# Altium PCB RoboticArmIEEE_Main.PcbDoc
Units mil, origin at the board's own origin, x right, y up, seen from the top; angles counter-clockwise.
Board outline 2747.37 x 5357.31 mil, 2 copper layers (Top Layer, Bottom Layer); 36 components, 27 nets, 126 pads, 5 vias.
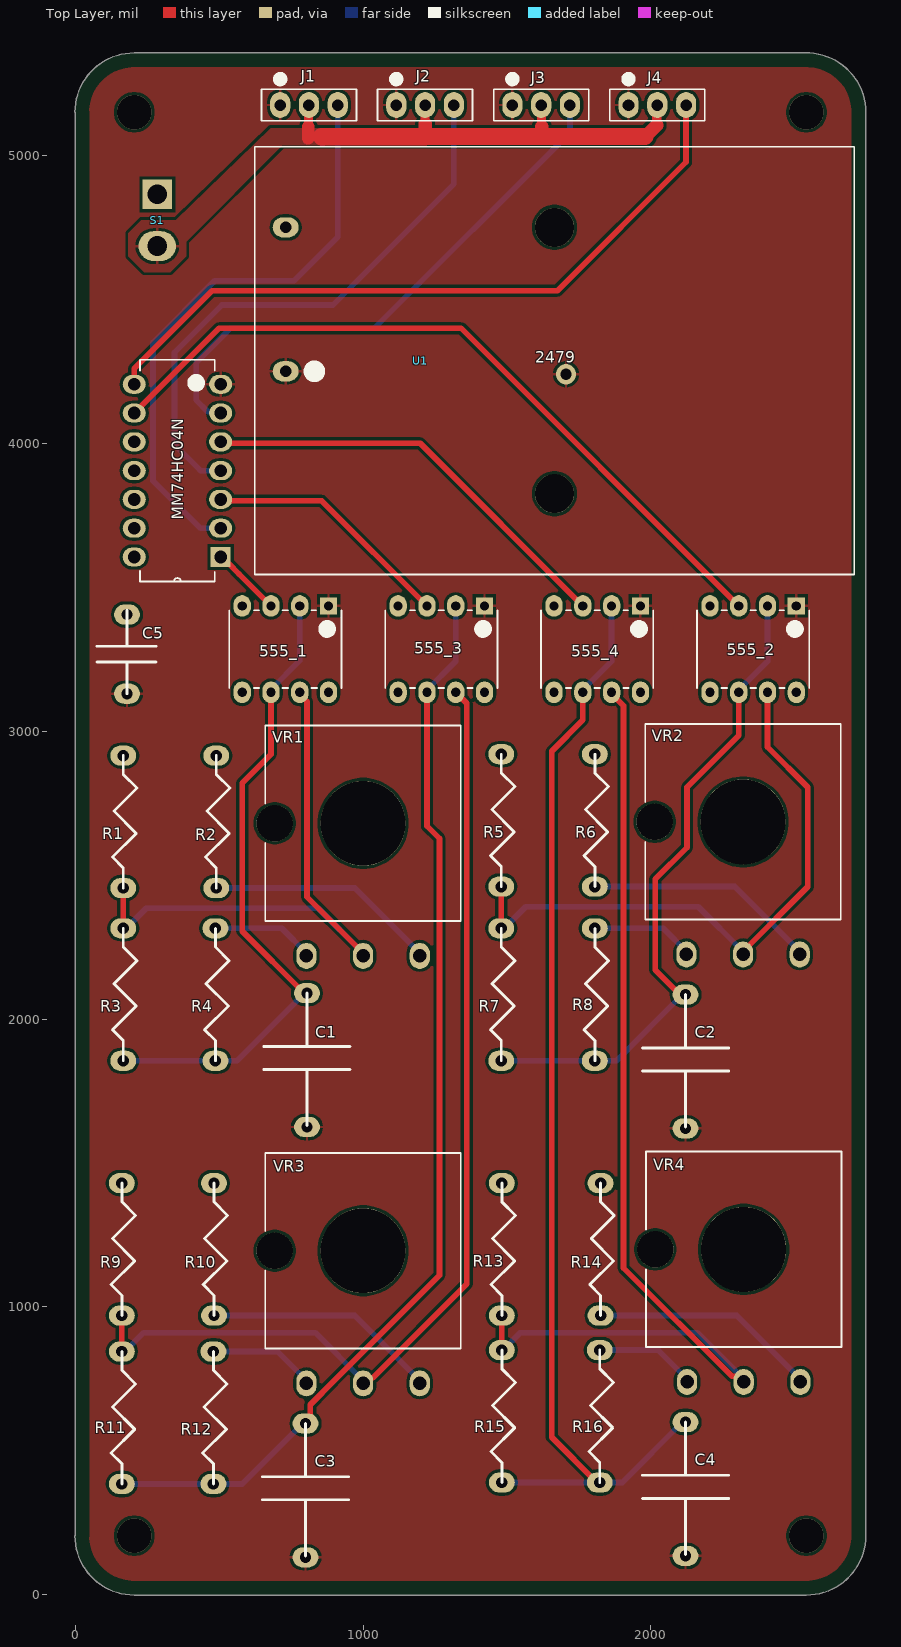
[diagram p0: Top Layer view]
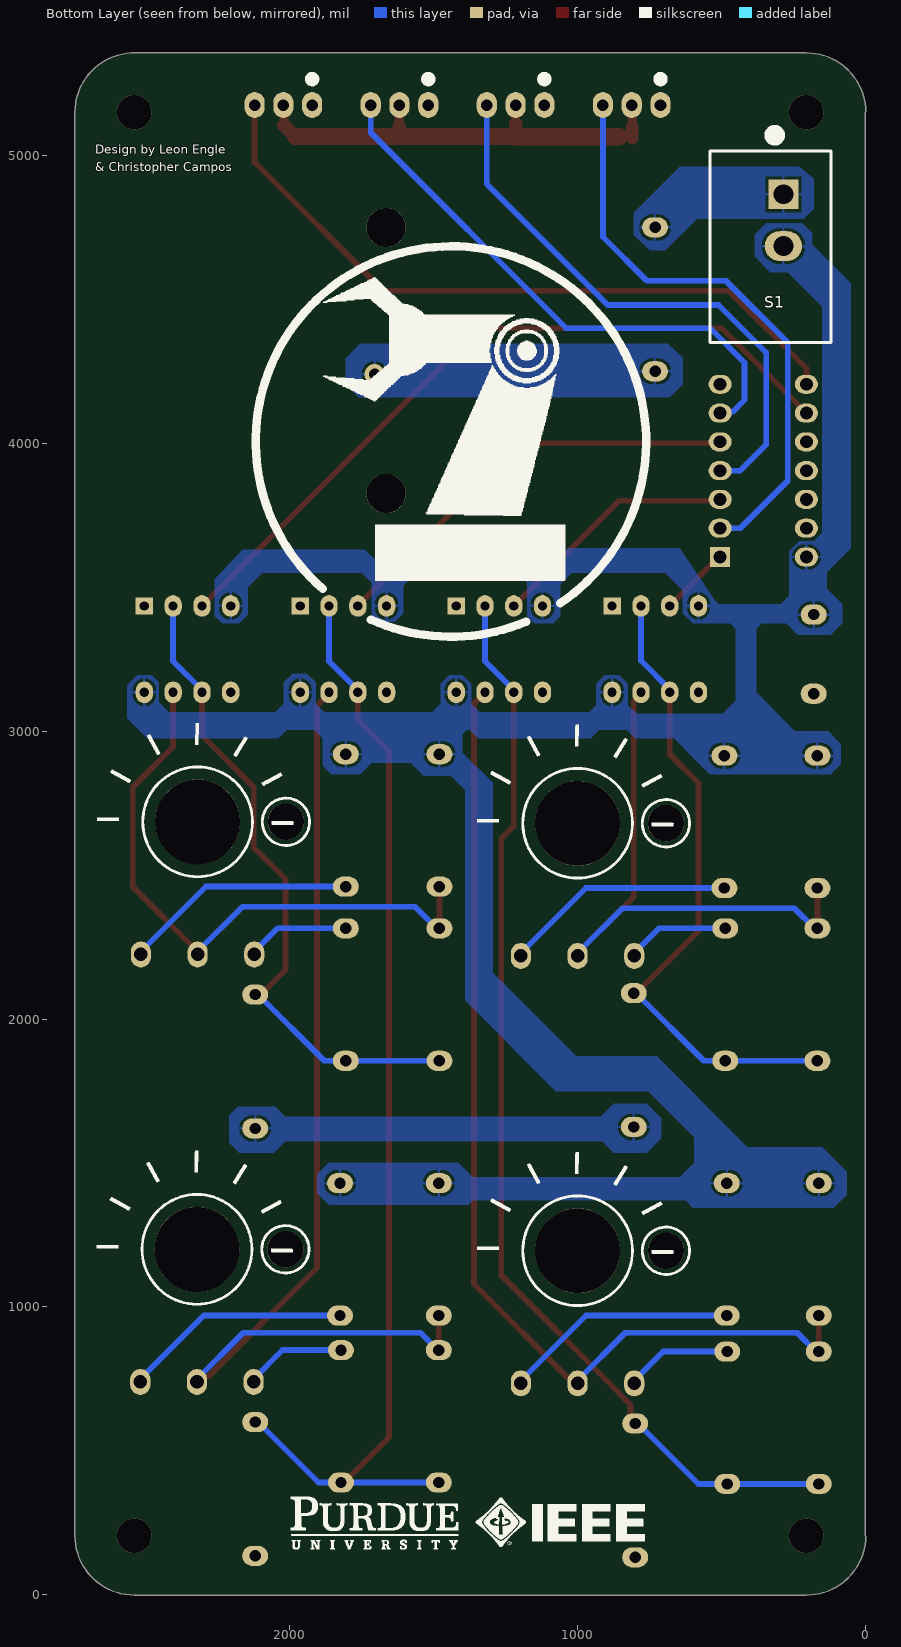
[diagram p1: Bottom Layer view, seen from below]

## Layer stack, top to bottom
Top Solder: solder mask 0.4, Solder Resist, Dk 3.5
Top Layer: signal copper 1.4
Dielectric 1: dielectric 12.6, FR-4, Dk 4.8
Bottom Layer: signal copper 1.4
Bottom Solder: solder mask 0.4, Solder Resist, Dk 3.5

## Board outline
205,-1.16 cw(c205,205) -1.16,205 0,205 0,5150 -1.16,5150 cw(c205,5150) 205,5356.16 2535,5356.16 cw(c2540,5150) 2746.22,5150 2746.16,5145 2746.16,205 cw(c2540,205) 2540,-1.16

## Design rules (kind name [scope] priority, off if disabled: settings)
BoardOutlineClearance [All] p1: gap=10 ignorepadtopadclearanceinfootprint=FALSE except(0: Arc-SplitContinuation Track-SplitContinuation SMDPad-SplitContinuation THPad-SplitContinuation Via-SplitContinuation Fill-SplitContinuation Poly-SplitContinuation Region-SplitContinuation Text-OutlineEdge Text-SplitContinuation; 50: Poly-OutlineEdge)
Clearance [All] p1: gap=10 ignorepadtopadclearanceinfootprint=FALSE
ComponentClearance [All] p1 off: gap=10 collisioncheckmode=3 verticalgap=10 showdistances=FALSE
HoleSize [All] p1: absolutevalues=TRUE maxlimit=393.7 minlimit=1 maxpercent=80.000 minpercent=20.000
PlaneClearance [All] p1: clearance=29.53
PolygonConnect [All] p1: connectstyle=Relief reliefconductorwidth=10 reliefentries=4 polygonreliefangle="90 Angle" airgapwidth=10
RoutingVias [All] p1: holewidth=28 width=50 viastyle="Through Hole" minholewidth=28 minwidth=50 maxholewidth=28 maxwidth=50
SolderMaskExpansion [All] p1: expansion=4 istentingtop=FALSE
SupplyNets "Schematic Supply Nets_1" [InNet('+5')] p1: voltage=0.000
SupplyNets "Schematic Supply Nets" [InNet('GND')] p2: voltage=0.000
Width [InNet('gnd')] p1: maxlimit=70 minlimit=20 preferedwidth=50 minimp=50.000000 maximp=50.000000 favimp=50.000000
27 further rules are at their usual default settings.

## Components (designator, comment, footprint, x,y, rotation, side; value= is the part's Value field where it differs from the comment)
555_1 "LMC555CNNOPB" N08E_TEX 880,3435 r270 top
555_2 "LMC555CNNOPB" N08E_TEX 2505,3435 r270 top
555_3 "LMC555CNNOPB" N08E_TEX 1421.67,3435 r270 top
555_4 "LMC555CNNOPB" N08E_TEX 1963.33,3435 r270 top
C1 "Cap_Big" CAP_BIG 870,1795 r90 top
C2 "Cap_Big" CAP_BIG 2185,1790 r90 top
C3 "Cap_Big" CAP_BIG 865,300 r90 top
C4 "Cap_Big" CAP_BIG 2185,305 r90 top
C5 "Cap_Small" CAP_SMALL 185,3260 r90 top
J1 "PPTC031LFBN-RC" CONN_PPTC031_SUL 711.97,5175 r180 top (schematic designator Connector1)
J2 "PPTC031LFBN-RC" CONN_PPTC031_SUL 1115.3,5175 r180 top
J3 "PPTC031LFBN-RC" CONN_PPTC031_SUL 1518.63,5175 r180 top
J4 "PPTC031LFBN-RC" CONN_PPTC031_SUL 1921.97,5175 r180 top
MM74HC04N "MM74HC04N" DIP254P762X533-14 205,4205 r180 top
R1 "R?" RESISTOR 91.97,2540 r90 top
R2 "Resistor" RESISTOR 415,2540 r90 top
R3 "Resistor" RESISTOR 91.97,1940 r90 top
R4 "Resistor" RESISTOR 411.97,1940 r90 top
R5 "R?" RESISTOR 1405,2545 r90 top
R6 "Resistor" RESISTOR 1730,2545 r90 top
R7 "Resistor" RESISTOR 1405,1940 r90 top
R8 "Resistor" RESISTOR 1730,1940 r90 top
R9 "R?" RESISTOR 86.97,1055 r90 top
R10 "Resistor" RESISTOR 406.97,1055 r90 top
R11 "Resistor" RESISTOR 86.97,470 r90 top
R12 "Resistor" RESISTOR 405,470 r90 top
R13 "R?" RESISTOR 1406.97,1055 r90 top
R14 "Resistor" RESISTOR 1750,1055 r90 top
R15 "Resistor" RESISTOR 1406.97,475 r90 top
R16 "Resistor" RESISTOR 1746.97,475 r90 top
S1 "GF-123-0054" SW_GF-123-0054 325,4665 r270 top locked
U1 "2479" 2479PCB_37P49X52P63_KEY 731,4750 r270 top locked
VR1 "P160KNPD-2QC25B2K" IC3_P160KNPD-2QC25B2K_BIT 803.15,2219.37 r0 top
VR2 "P160KNPD-2QC25B2K" IC3_P160KNPD-2QC25B2K_BIT 2123.15,2224.37 r0 top
VR3 "P160KNPD-2QC25B2K" IC3_P160KNPD-2QC25B2K_BIT 803.15,734.37 r0 top
VR4 "P160KNPD-2QC25B2K" IC3_P160KNPD-2QC25B2K_BIT 2125.24,739.37 r0 top

## Footprints (in the part's own frame and the unit in brackets; to place one, negate y for a bottom-side part, rotate by r counter-clockwise, add the part's x,y. Pads: shape width x height; smd on the part's side, far side on the other; paste and mask are expansions set on the pad)
2479PCB_37P49X52P63_KEY [mil]
  oval 70x90 hole 40 paste-99999 mask+0: 1(0,0) 2(500,0)
  round 136 / inner round 60 / far side round 136 hole 136 unplated paste-99999 mask-68: 3(0,934) 4(925,934)
  silkscreen extent -281,-107 1206,1975
CAP_BIG [mil]
  oval 70x90 hole 39.37: 1(-170,65) 2(295,65)
  silkscreen extent -165,-85 295,215
CAP_SMALL [mil]
  oval 70x90 hole 39.37: 1(-130,5) 2(145,5)
  silkscreen extent -130,-95 160,110
CONN_PPTC031_SUL [mil]
  oval 70x90 hole 40 paste-99999 mask+0: 1(0,0) 2(-100,0) 3(-200,0)
  silkscreen extent -265,-105 65,55, body extent -260,-50 60,50, height 335
DIP254P762X533-14 [mil]
  rect 70x70 hole 44: 1(-300,600)
  oval 80x66 hole 44: 2(-300,500) 3(-300,400) 4(-300,300) 5(-300,200) 6(-300,100) 7(-300,0) 8(0,0) 9(0,100) 10(0,200) 11(0,300) 12(0,400) 13(0,500) 14(0,600)
  silkscreen extent -280,-85 -20,685
IC3_P160KNPD-2QC25B2K_BIT [mil]
  oval 70x90 hole 47 paste-99999 mask+0: 1(0,0) 2(196.85,0) 3(393.7,0)
  round 295 / inner round 60 / far side round 295 hole 295 unplated paste-99999 mask-147.5: 4(196.85,460.63)
  round 126 / inner round 60 / far side round 126 hole 126 unplated paste-99999 mask-63: 5(-110.24,460.63)
  silkscreen extent -143,121 536,800
N08E_TEX [mil]
  rect 60x60 / inner round 60 / far side rect 60x60 hole 32 paste-99999 mask+0: 1(0,0)
  oval 75x60 hole 32 paste-99999 mask+0: 2(0,-100) 3(0,-200) 4(0,-300) 5(300,-300) 6(300,-200) 7(300,-100) 8(300,0)
  silkscreen extent 15,-345 285,45, body extent -5,-340 315,40, height 215
RESISTOR [mil]
  oval 70x90 hole 39.37: 1(-85,-75) 2(375,-75)
  silkscreen extent -85,-122 375,-38
SW_GF-123-0054 [mm]
  rect 2.625x2.625 hole 1.75: 1(-5.08,-1.016)
  oval 2.625x3.311 hole 1.75: 2(-0.508,-1.016)
  body extent -8.69,-4.95 7.77,5.21, height 4.06

## Part data
555_1 555_2 555_3 555_4: "No Description Available", Mfr_Name="Texas Instruments", RefDes=RefDes, Type=Type
J1 J2 J3 J4: "No Description Available", Mfr_Name=Sullins, RefDes=RefDes, Type=Type
MM74HC04N: library part CMP-016-00010-1, "Inverter IC 6 Channel 14-PDIP", Case/Package="PDIP-14 ON Semiconductor", Availability=Unavailable, Component Type=Standard, Design Item ID=MM74HC04N, MF="ON Semiconductor", MP=MM74HC04N, Pins=14, Price=None, SnapEDA_Link=https://www.snapeda.com/parts/MM74HC04N/ON%20Semiconductor/view-part/2081914/?ref=snap, Source=SnapEDAsch.SchLib
R1 R5 R9 R13: library part Resistor
S1: "Slide Switch SPST Through Hole", Package=None, Availability=Unavailable, MP=GF-123-0054, Price=None
U1: "No Description Available", Mfr_Name="Keystone Electronics", RefDes=RefDes, Type=Type
VR1 VR2 VR3 VR4: "No Description Available", Mfr_Name="TT Electronics / BI Technologies", RefDes=RefDes, Type=Type

## Via types
v1: diameter 120, hole 120, Top Layer to Bottom Layer, 4 vias
v2: diameter 70/70 (per signal layer), hole 39.27, Top Layer to Bottom Layer, 1 vias

## Nets (pads, with @x,y where several pads share a name; then routed paths per layer and width w, separated by ;. In a path a pad name is that pad's centre, name@x,y a point inside that pad or via, vN(x,y) a via of type N, cw(c..) or ccw(c..) an arc to the next point about the centre after c; other vN are vias at no path point)
+5: 555_1.4 555_1.8 555_2.4 555_2.8 555_3.4 555_3.8 555_4.4 555_4.8 C5.2 J1.2 J2.2 J3.2 J4.2 MM74HC04N.14 R1.2 R2.2 R5.2 R6.2 R9.2 R10.2 R13.2 R14.2 S1.2 | length 1606.2
  Top Layer w31.5: 810,5100 J1.2@810,5173.03 ; 1215.3,5110.3 J2.2 ; J3.2 1620,5173.63 1620,5100 ; 2020,5105 2020,5173.03 J4.2 J4.2@2029.33,5167.63
  Top Layer w35.43: J1.2@810,5173.03 J1.2
  Top Layer w43.31: 810,5060 810,5100
  Top Layer w47.24: 1215.3,5065.3 1215.3,5110.3 ; 1620,5065 1620,5100 ; 1980,5065 2020,5105
  Top Layer w59.06: 1215.3,5065.3 1619.7,5065.3 1620,5065 1980,5065 ; J3.2@1616.54,5172.91 J3.2
  Top Layer w60: 855.3,5065.3 1215.3,5065.3
  Bottom Layer w86.61: S1.2@280.47,4685 S1.2
Battery5V: S1.1 U1.1
CapBig1: 555_1.2 555_1.6 C1.2 R3.1 R4.1 | length 2262.3
  Top Layer w20: 555_1.6 680,2919.94 580,2819.94 580,2305 795,2090 C1.2
  Bottom Layer w20: R3.1 R4.1 561.97,1855 796.97,2090 C1.2 ; 555_1.6 680,3145 780,3245 555_1.2
CapBig2: 555_2.2 555_2.6 C2.2 R7.1 R8.1 | length 2302
  Top Layer w20: C2.2 2100,2085 2015,2170 2015,2486.31 2125,2596.31 2125,2805 2305,2985 555_2.6
  Bottom Layer w20: R7.1 R8.1 1880,1855 2110,2085 C2.2 ; 555_2.6 2305,3142.5 2405,3242.5 555_2.2
CapBig3: 555_3.2 555_3.6 C3.2 R11.1 R12.1 | length 3817
  Top Layer w20: C3.2 816.56,611.56 816.56,660 858.15,701.59 858.15,703.15 1265,1110 1265,2627.14 1221.67,2670.47 555_3.6
  Bottom Layer w20: R11.1 R12.1 580,385 790,595 C3.2 ; 555_3.6 1221.67,3142.5 1321.67,3242.5 555_3.2
CapBig4: 555_4.2 555_4.6 C4.2 R15.1 R16.1 | length 3931.3
  Top Layer w20: 555_4.6 1763.33,3038.33 1655,2930 1655,546.97 1811.97,390 R16.1
  Bottom Layer w20: R15.1 R16.1 1900,390 2110,600 C4.2 ; 555_4.6 1763.33,3142.5 1863.33,3242.5 555_4.2
gnd: 555_1.1 555_2.1 555_3.1 555_4.1 C1.1 C2.1 C3.1 C4.1 C5.1 J1.1 J2.1 J3.1 J4.1 MM74HC04N.7 U1.2 | length 20.1
  Top Layer w50: MM74HC04N.7 MM74HC04N.7@509.33,4205
  Bottom Layer w31.5: J4.1@1920,5173.03 J4.1 J4.1@1921.97,5188.03
  other v2: 1705,4240
InvOut1: J1.3 MM74HC04N.2 | length 2035.3
  Bottom Layer w20: MM74HC04N.2 435,3705 270,3870 270,4350 485,4565 760,4565 911.97,4716.97 911.97,5115.02 J1.3
InvOut2: J4.3 MM74HC04N.8 | length 2467
  Top Layer w20: MM74HC04N.8 205,4260 475,4530 1675,4530 2121.97,4976.97 J4.3
InvOut3: J2.3 MM74HC04N.4 | length 2004.7
  Bottom Layer w20: MM74HC04N.4 435,3905 345,3995 345,4315 510,4480 895,4480 1315.3,4900.3 J2.3
InvOut4: J3.3 MM74HC04N.6 | length 1959.4
  Bottom Layer w20: MM74HC04N.6 500.45,4109.55 460.45,4109.55 420,4150 420,4280 540,4400 1040,4400 1718.63,5078.63 J3.3
Net555_1_7: 555_1.7 R1.1 R3.2 VR1.2 | length 2083.2
  Top Layer w20: R3.2 R1.1 ; 555_1.7 780,3128.28 805,3103.28 805,2424.37 1000,2229.37 VR1.2
  Bottom Layer w20: R3.2 176.97,2315 246.97,2385 844.37,2385 1000,2229.37 VR1.2
Net555_2_7: 555_2.7 R5.1 R7.2 VR2.2 | length 2152.3
  Top Layer w20: R7.2 R5.1 ; VR2.2 2320,2234.37 2545,2459.37 2545,2805 2405,2945 555_2.7
  Bottom Layer w20: R7.2 1490,2315 1565,2390 2164.37,2390 2320,2234.37 VR2.2
Net555_3_7: 555_3.7 R9.1 R11.2 VR3.2 | length 3642.6
  Top Layer w20: R11.2 R9.1 ; VR3.2 1019.57,753.94 1033.94,753.94 1360,1080 1360,3096.67 555_3.7
  Bottom Layer w20: R11.2 171.97,845 236.97,910 834.37,910 1000,744.37 VR3.2
Net555_4_7: 555_4.7 R13.1 R15.2 VR4.2 | length 3659.7
  Top Layer w20: R15.2 R13.1 ; 555_4.7 1863.33,3129.95 1905,3088.28 1905,1135 2281.06,758.94 2302.52,758.94 VR4.2
  Bottom Layer w20: R15.2 1486.11,850 1546.11,910 2161.46,910 2322.09,749.37 VR4.2
Out1: 555_1.3 MM74HC04N.1 | length 245.4
  Top Layer w20: MM74HC04N.1 528,3582 533,3582 568.78,3546.22 555_1.3
Out2: 555_2.3 MM74HC04N.9 | length 2621.9
  Top Layer w20: MM74HC04N.9 500,4400 1340,4400 555_2.3
Out3: 555_3.3 MM74HC04N.3 | length 869.9
  Top Layer w20: MM74HC04N.3 510,3800 856.67,3800 555_3.3
Out4: 555_4.3 MM74HC04N.5 | length 1494.4
  Top Layer w20: MM74HC04N.5 510,4000 1198.33,4000 555_4.3
PotBottom1: R4.2 VR1.1 | length 361.7
  Bottom Layer w20: R4.2 717.52,2315 803.15,2229.37 VR1.1
PotBottom2: R8.2 VR2.1 | length 361.5
  Bottom Layer w20: R8.2 2042.52,2315 2123.15,2234.37 VR2.1
PotBottom3: R12.2 VR3.1 | length 374.8
  Bottom Layer w20: R12.2 702.52,845 803.15,744.37 VR3.1
PotBottom4: R16.2 VR4.1 | length 355
  Bottom Layer w20: R16.2 2024.61,850 2125.24,749.37 VR4.1
PotTop1: R2.1 VR1.3 | length 810.3
  Bottom Layer w20: R2.1 971.22,2455 1196.85,2229.37 VR1.3
PotTop2: R6.1 VR2.3 | length 815.3
  Bottom Layer w20: R6.1 2291.22,2460 2516.85,2234.37 VR2.3
PotTop3: R10.1 VR3.3 | length 818.3
  Bottom Layer w20: R10.1 971.22,970 1196.85,744.37 VR3.3
PotTop4: R14.1 VR4.3 | length 795.3
  Bottom Layer w20: R14.1 2298.31,970 2518.94,749.37 VR4.3
pads on no net: 555_1.5 555_2.5 555_3.5 555_4.5 MM74HC04N.10 MM74HC04N.11 MM74HC04N.12 MM74HC04N.13 U1.3 U1.4 VR1.4 VR1.5 VR2.4 VR2.5 VR3.4 VR3.5 VR4.4 VR4.5
copper on no net:
  other v1: 205,205 2540,205 205,5150 2540,5150

## Polygon pours and split planes (outlines as drawn)
gnd on Top Layer "NONET_L-01_P-001" (solid, pour order 31): 0,5355 2745,5355 2745,0 0,0
gnd on Top Layer "NONET_L-01_P-001" (solid, pour order 12): 785,4310 825,4270 825,4220 785,4180 580,4180 550,4150 475,4150 400,4075 400,3230 230,3060 135,3060 95,3100 95,3160 140,3205 235,3205 305,3275 305,4105 400,4200 470,4270 550,4270 575,4245 625,4245 690,4310
gnd on Top Layer "NONET_L-01_P-001" (solid, pour order 13): 400,3340 400,3390 450,3340 785,3340 820,3375 820,3480 845,3505 920,3505 945,3480 945,3375 985,3335 1330,3335 1365,3370 1365,3475 1385,3495 1460,3495 1480,3475 1480,3375 1520,3335 1870,3335 1905,3370 1905,3475 1930,3500 2000,3500 2025,3475 2025,3370 2060,3335 2385,3335 2445,3395 2445,3475 2470,3500 2545,3500 2565,3480 2565,3360 2455,3250 2048.11,3250 2008.11,3290 1910,3290 1875,3255 1495,3255 1465,3285 1370,3285 1340,3255 975,3255 945,3285 840,3285 805,3250 420,3250 394.5,3224.5
+5 on Top Layer "NONET_L-01_P-001" (solid, pour order 22): 185,4650 240,4595 330,4595 385,4650 385,4700 720,5035 865,5035 865,5095 679.79,5095 349.58,4775 230,4775 185,4730
gnd on Top Layer "NONET_L-01_P-001" (solid, pour order 19): 265,1790 265,345 520,90 695,90 740,45 855,45 900,90 2015,90 2065,40 2180,40 2225,85 2225,165 2175,215 2055,215 2010,170 910,170 870,210 740,210 695,165 565,165 350,380 350,1585 380,1615 435.32,1615
gnd on Top Layer "NONET_L-01_P-001" (solid, pour order 16): 370,3205 370,1825 495,1700 860,1700 900,1660 900,1585 870,1555 490,1555 265,1780 265,3025 230,3060
gnd on Bottom Layer "NONET_L-01_P-001" (solid, pour order 35): 635,4296.92 635,4205 680,4160 1760,4160 1805,4205 1805,4295 1755,4345 687.08,4345
+5 on Bottom Layer "NONET_L-01_P-001" (solid, pour order 4): 181.25,3660 230,3660 265,3625 265,3470 295,3440 510,3440 555,3485 600,3485 635,3450 630,3445 630,3405 600,3375 275,3375 235,3335 120,3335 80,3375 80,3440 135,3495 135,3607.14
+5 on Bottom Layer "NONET_L-01_P-001" (solid, pour order 29): 2162.29,3630 2260,3528.04 2260,3400 2235,3375 2175,3375 2145,3405 2145,3500 2095,3550 1750,3550 1715,3515 1715,3405 1690,3380 1635,3380 1605,3410 1605,3505 1560,3550 1210,3550 1175,3515 1175,3400 1150,3375 1085,3375 1060,3400 1060,3510 1020,3550 695,3550 635,3490 635,3410 610,3385 535,3385 515,3405 515,3440 645,3635 1031.89,3635 1071.89,3595 1170,3595 1205,3630 1585,3630 1615,3600 1710,3600 1740,3630 2160,3630
+5 on Bottom Layer "NONET_L-01_P-001" (solid, pour order 8): 487.89,3057.89 490,3060 795,3060 825,3090 825,3165 855,3195 905,3195 935,3165 935,3090 960,3065 1340,3065 1370,3095 1370,3165 1400,3195 1445,3195 1475,3165 1475,3095 1505,3065 1880,3065 1910,3095 1910,3170 1940,3200 1990,3200 2020,3170 2020,3095 2050,3065 2420,3065 2455,3100 2455,3170 2480,3195 2530,3195 2565,3160 2565,3045 2495,2975 2040,2975 2010,3005 1915,3005 1885,2975 1500,2975 1470,3005 1375,3005 1345,2975 955,2975 925,3005 830,3005 800,2975 580,2975
+5 on Bottom Layer "NONET_L-01_P-001" (solid, pour order 5): 140,3596.67 185,3641.67 185,3655 150,3690 150,4475 270,4595 330,4595 385,4650 385,4725 345,4765 220,4765 185,4730 185,4690 35,4540 35,3651.07 140,3546.07
Battery5V on Bottom Layer "NONET_L-01_P-001" (solid, pour order 3): 230.56,4960 645,4960 805,4800 805,4725 750,4670 695,4670 585,4780 215,4780 180,4815 180,4918.64
+5 on Bottom Layer "NONET_L-01_P-001" (solid, pour order 21): 575,3000 580,2995 685,2995 580,2890 575,2895 560,2895 560,2980 555,2985 570,3000
+5 on Bottom Layer "NONET_L-01_P-001" (solid, pour order 18): 595,1500 645,1450 1365,1450 1415,1500 1865,1500 1905,1460 1905,1395 1865,1355 1380,1355 1365,1370 625,1370 600,1345 530,1345
gnd on Bottom Layer "NONET_L-01_P-001" (solid, pour order 17): 710,1585 710,1655 760,1705 875,1705 920,1660 2015,1660 2050,1695 2180,1695 2210,1665 2210,1570 2175,1535 2055,1535 2015,1575 915,1575 875,1535 760,1535
+5 on Bottom Layer "NONET_L-01_P-001" (solid, pour order 15): 1440,2845 1390,2795 1390,2065 1075,1750 755,1750 595,1590 595,1410 530,1345 110,1345 65,1390 65,1470 150,1555 410,1555 725,1870 1005,1870 1295,2160 1295,2820 1405,2930
+5 on Bottom Layer "NONET_L-01_P-001" (solid, pour order 14): 1375.1,3014.9 1400,2990 1400,2885 1440,2845 1535,2845 1580,2890 1715,2890 1755,2850 1855,2850 1885,2880 1885,3005.28
+5 on Bottom Layer "NONET_L-01_P-001" (solid, pour order 7): 540,2850 580,2890 580,2975 450,3105 450,3160 420,3160 210,2950 210,2850
+5 on Bottom Layer "NONET_L-01_P-001" (solid, pour order 6): 210,2850 255,2895 255,2965 450,3160 450,3355 475,3380 360,3380 360,3375 380,3355 380,3135 245,3000 130,3000 85,2955 85,2885 120,2850

## Silkscreen, mask and mechanical layers (free items; w line width, h text height)
Top Overlay:
Bottom Overlay:
  drawing of 32 lines, arcs and shapes, not listed
  text "Design by Leon Engle" at 2675,5005 h30
  text "& Christopher Campos" at 2675,4945 h30
Board Shape:
  lines w10: -1.16,205 ccw(c205,205) 205,-1.16 2540,-1.16 ccw(c2540,205) 2746.16,205 2746.16,5145 ; -1.16,5150 cw(c205,5150) 205,5356.16 2535,5356.16 cw(c2540,5150) 2746.22,5150 ; 0,205 0,5150

## Text inside footprints (layer, text, board x,y; h text height)
555_1: Board Shape "*" at 855,3417.5 h50 r270
555_2: Board Shape "*" at 2480,3417.5 h50 r270
555_3: Board Shape "*" at 1396.67,3417.5 h50 r270
555_4: Board Shape "*" at 1938.33,3417.5 h50 r270